# EAGLE board rev0.1 (EAGLE 8.3.1)
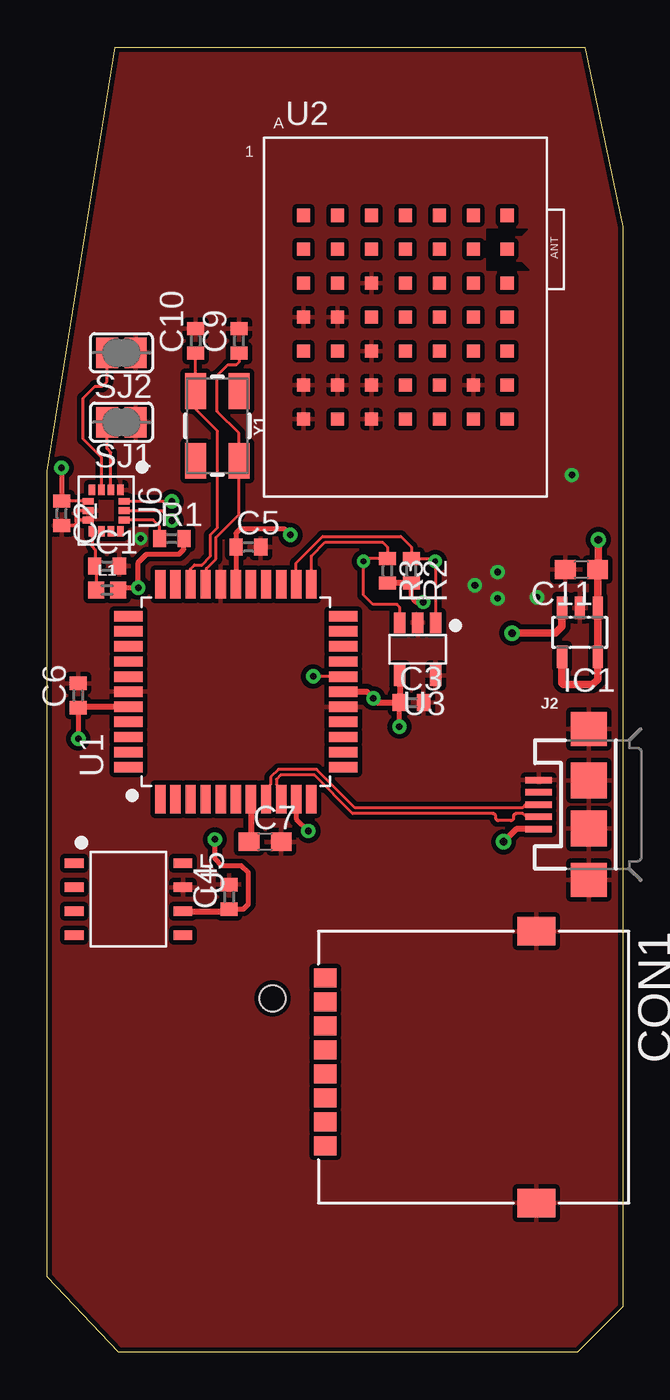
[diagram p0: board, top side]
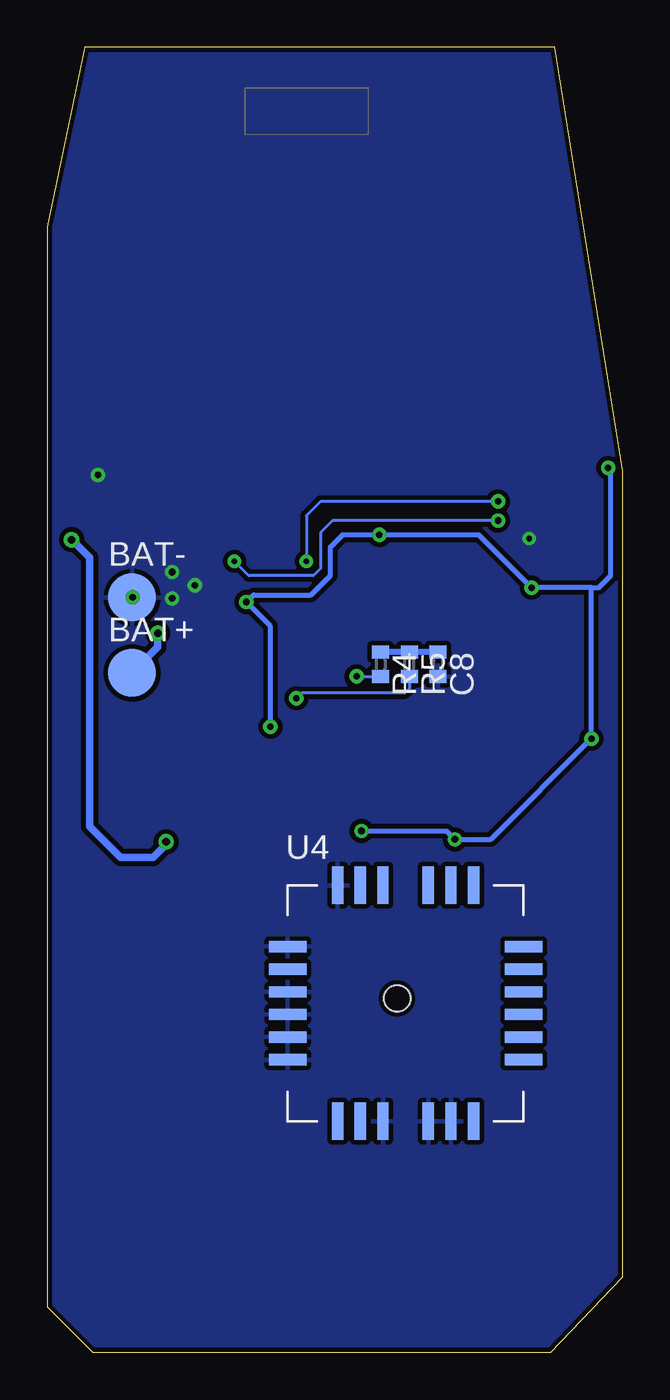
[diagram p1: board, bottom side, seen from below]

Size 30.5 x 69.15 mm. Coordinates in mm from the lower left corner, seen from the top.
Outline: 28.1,0 3.8,0 0,4 0,46.7 3.6,69.15 28.5,69.15 30.5,59.65 30.5,2.4 28.1,0
Copper layers (1*16): Top 0.035mm / dielectric 1.5mm / Bottom 0.035mm
Design rules "default *": minimum track width 6mil, minimum drill 0.3mm, track to track 6mil, track to pad 6mil, pad to pad 6mil, via to via 6mil, smd to smd 6mil, copper to edge 10mil, drill to drill 6mil, minimum pad ring 10mil, minimum via ring 8mil, stop-mask expansion 4mil, vias tented up to drill 0mil, thermal gap 10mil

## Footprints (pad centres in the part's own frame; a part is rotated, then mirrored left to right if it is on the bottom)
B2,54 = smd 2.54 x 2.54: TP 0,0
C0402 = smd 0.7 x 0.9: 1 -0.65,0; 2 0.65,0
C0603 = smd 1.1 x 1: 1 -0.85,0; 2 0.85,0
SIMCARD_HOLDER_693022010811 = smd 1 x 1.2: C1 -4.72,0; C2 -2.18,0; C3 0.36,0; C4 2.9,0; C5 -3.45,0; C6 -0.91,0; C7 1.63,0; C8 4.17,0 | smd 1.5 x 2: P$9 -7.2,11.2; P$10 7.2,11.2
SOT23-5L = smd 0.55 x 1.2: 1 -0.95,-1.3; 2 0,-1.3; 3 0.95,-1.3; 4 0.95,1.3; 5 -0.95,1.3
USB-MICROB = smd 1.4 x 0.35: D+ -2.65,0; D- -2.65,-0.65; GND -2.65,1.3; ID -2.65,0.65; VBUS -2.65,-1.3 | smd 1.9 x 1.8: MT1 0,-4; MT2 0,4 | smd 1.9 x 1.9: P$1 0,-1.27; P$2 0,1.27
0402 = smd 0.85 x 0.9: 1 -0.58,0; 2 0.58,0
R0402 = smd 0.7 x 0.9: 1 -0.65,0; 2 0.65,0
SJ = smd 1.168 x 1.6: 1 -0.762,0; 2 0.762,0
PIC24FJ128GB204 = smd 1.5 x 0.55: 1 -5.7,4; 2 -5.7,3.2; 3 -5.7,2.4; 4 -5.7,1.6; 5 -5.7,0.8; 6 -5.7,0; 7 -5.7,-0.8; 8 -5.7,-1.6; 9 -5.7,-2.4; 10 -5.7,-3.2; 11 -5.7,-4; 23 5.7,-4; 24 5.7,-3.2; 25 5.7,-2.4; 26 5.7,-1.6; 27 5.7,-0.8; 28 5.7,0; 29 5.7,0.8; 30 5.7,1.6; 31 5.7,2.4; 32 5.7,3.2; 33 5.7,4 | smd 0.55 x 1.5: 12 -4,-5.7; 13 -3.2,-5.7; 14 -2.4,-5.7; 15 -1.6,-5.7; 16 -0.8,-5.7; 17 0,-5.7; 18 0.8,-5.7; 19 1.6,-5.7; 20 2.4,-5.7; 21 3.2,-5.7; 22 4,-5.7; 34 4,5.7; 35 3.2,5.7; 36 2.4,5.7; 37 1.6,5.7; 38 0.8,5.7; 39 0,5.7; 40 -0.8,5.7; 41 -1.6,5.7; 42 -2.4,5.7; 43 -3.2,5.7; 44 -4,5.7
TELIT_RE866 = smd 0.7 x 0.7: A1 -5.4,5.4; A2 -3.6,5.4; A3 -1.8,5.4; A4 0,5.4; A5 1.8,5.4; A6 3.6,5.4; A7 5.4,5.4; B1 -5.4,3.6; B2 -3.6,3.6; B3 -1.8,3.6; B4 0,3.6; B5 1.8,3.6; B6 3.6,3.6; B7 5.4,3.6; C1 -5.4,1.8; C2 -3.6,1.8; C3 -1.8,1.8; C4 0,1.8; C5 1.8,1.8; C6 3.6,1.8; C7 5.4,1.8; D1 -5.4,0; D2 -3.6,0; D3 -1.8,0; D4 0,0; D5 1.8,0; D6 3.6,0; D7 5.4,0; E1 -5.4,-1.8; E2 -3.6,-1.8; E3 -1.8,-1.8; E4 0,-1.8; E5 1.8,-1.8; E6 3.6,-1.8; E7 5.4,-1.8; F1 -5.4,-3.6; F2 -3.6,-3.6; F3 -1.8,-3.6; F4 0,-3.6; F5 1.8,-3.6; F6 3.6,-3.6; F7 5.4,-3.6; G1 -5.4,-5.4; G2 -3.6,-5.4; G3 -1.8,-5.4; G4 0,-5.4; G5 1.8,-5.4; G6 3.6,-5.4; G7 5.4,-5.4
24LC32A-SOT23-5 = smd 0.6 x 1.1: 1 -0.95,-1.4; 2 0,-1.4; 3 0.95,-1.4; 4 0.95,1.4; 5 -0.95,1.4
TITAN-X1-GMS-3302 = smd 2 x 0.6: 1 -6.25,3; 2 -6.25,1.8; 3 -6.25,0.6; 4 -6.25,-0.6; 5 -6.25,-1.8; 6 -6.25,-3; 13 6.25,-3; 14 6.25,-1.8; 15 6.25,-0.6; 16 6.25,0.6; 17 6.25,1.8; 18 6.25,3 | smd 0.6 x 2: 7 -3.6,-6.25; 8 -2.4,-6.25; 9 -1.2,-6.25; 10 1.2,-6.25; 11 2.4,-6.25; 12 3.6,-6.25; 19 3.6,6.25; 20 2.4,6.25; 21 1.2,6.25; 22 -1.2,6.25; 23 -2.4,6.25; 24 -3.6,6.25 | hole 1.4: -0.45,0.25
AT45DB161E-SHD2B-T = smd 0.5 x 1: 1 -1.905,-2.875; 2 -0.635,-2.875; 3 0.635,-2.875; 4 1.905,-2.875; 5 1.905,2.875; 6 0.635,2.875; 7 -0.635,2.875; 8 -1.905,2.875
LSM6DSL = smd 0.575 x 0.35: 1 -1.1,0.75; 2 -1.1,0.25; 3 -1.1,-0.25; 4 -1.1,-0.75; 8 1.1,-0.75; 9 1.1,-0.25; 10 1.1,0.25; 11 1.1,0.75 | smd 0.35 x 0.575: 5 -0.5,-0.95; 6 0,-0.95; 7 0.5,-0.95; 12 0.5,0.95; 13 0,0.95; 14 -0.5,0.95
CRYSTAL-SMD-5X3.2-4PAD = smd 1.9 x 1.1: 1 -1.85,-1.15; 2 1.85,-1.15; 3 1.85,1.15; 4 -1.85,1.15

## Placement (x,y rotation side)
BAT+  PTR1B2,54  [B2,54]  26,36 0 bottom
BAT-  PTR1B2,54  [B2,54]  26,40 0 bottom
C1  0.1uF  [C0402]  3.17,41.66 0 top
C2  0.1uF  [C0402]  0.76,44.45 270 top
C3  0.1uF  [C0402]  19.3,34.42 0 top
C4  0.1uF  [C0402]  9.65,24.13 90 top
C5  0.1uF  [C0402]  10.67,42.67 0 top
C6  0.1uF  [C0402]  1.65,34.8 90 top
C7  10uF  [C0603]  11.56,27.05 0 top
C8  0.1uF  [C0402]  9.78,36.45 270 bottom
C9  22pF  [C0402]  10.16,53.59 90 top
C10  22pF  [C0402]  7.87,53.59 90 top
C11  1uF  [C0603]  28.32,41.47 180 top
CON1  SIMCARD_HOLDER_693022010811  [SIMCARD_HOLDER_693022010811]  14.73,15.11 270 top
IC1  MCP73811/2  [SOT23-5L]  28.23,38.15 180 top
J2  [USB-MICROB]  28.7,29.02 0 top
L1  MPZ1608D300BTA00  [0402]  3.17,40.39 0 top
R1  10K  [R0402]  6.6,43.12 0 top
R2  4.7K  [R0402]  19.3,41.4 270 top
R3  4.7K  [R0402]  18.03,41.4 270 top
R4  100R  [R0402]  12.83,36.45 270 bottom
R5  10K  [R0402]  11.3,36.45 270 bottom
SJ1  [SJ]  3.94,49.28 180 top
SJ2  [SJ]  3.94,52.96 180 top
U1  PIC24FJ128GB204  [PIC24FJ128GB204]  10,35 90 top
U2  TELIT_RE866  [TELIT_RE866]  18.98,54.84 0 top
U3  24LC32A-SOT23-5  [24LC32A-SOT23-5]  19.64,37.26 180 top
U4  TITAN-X1-GMS-3302  [TITAN-X1-GMS-3302]  11.5,18.5 0 bottom
U5  AT45DB161E-SHD2B-T  [AT45DB161E-SHD2B-T]  4.32,24 270 top
U6  LSM6DSL  [LSM6DSL]  3.13,44.6 270 top
Y1  16MHz  [CRYSTAL-SMD-5X3.2-4PAD]  9.02,49.09 270 top

## Library data of the parts
BAT+ BAT- = testpad
C1-C11 R1-R5 = resistor
CON1 U1-U6 = clackboard_lib
IC1 = adafruit
J2 = SparkFun-Connectors; PROD_ID: CONN-09505; SF_ID: PRT-08533
L1 = SparkFun-Coils; PROD_ID: NDUC-13457
SJ1 SJ2 = jumper
Y1 = SparkFun-Clocks; PROD_ID: XTAL-08218; SF_ID: COM-00094

## Nets
3.3V: C2.1 C3.1 C4.1 C5.1 C6.1 L1.2 R1.2 R2.2 R3.2 R5.2 U1.10 U1.17 U1.28 U1.40 U3.4 U5.6 U6.5
CS: U5.4
GND: BAT-.TP C1.2 C2.2 C3.2 C4.2 C5.2 C6.2 C7.2 C8.2 C9.2 C10.2 C11.2 CON1.P$9 CON1.P$10 IC1.2 J2.GND J2.MT1 J2.MT2 J2.P$1 J2.P$2 SJ1.1 SJ2.1 U1.16 U1.29 U1.39 U2.C3 U2.D1 U2.D2 U2.E3 U2.F1 U2.F2 U2.F3 U2.F6 U2.G1 U2.G3 U3.2 U3.5 U4.1 U4.3 U4.4 U4.5 U4.6 U4.9 U4.10 U4.11 U4.24 U5.7 U6.1 U6.6 U6.7
INT1: U6.4
INT2: U6.9
MCLR: R4.2 U1.18
MISO: U5.8
MOSI: U5.1
N$1: SJ1.2 U6.2
N$2: SJ2.2 U6.3
N$3: R1.1 U6.12
N$5: C1.1 L1.1 U6.8
N$6: C8.1 R4.1 R5.1
N$7: C9.1 U1.30 Y1.3
N$8: C10.1 U1.31 Y1.1
N$9: C7.1 U1.7
RESET: U5.3
RX0: U4.20
SCK: U5.2
SCL: R2.1 U1.24 U3.1 U6.13
SDA: R3.1 U1.23 U3.3 U6.14
TX0: U4.19
USB_N: J2.D- U1.9
USB_P: J2.D+ U1.8
V_USB: C11.1 IC1.1 IC1.4 IC1.5 J2.VBUS
VBAT: BAT+.TP IC1.3
WP: U5.5

## Tracks (layer width: path | path; a pad name or v marks a point on that pad's centre or on a via)
3.3V  (via drill 0.35)
  Top 0.152: U6.5 C2.1
  Top 0.254: C4.1 10.4,23.48 10.67,23.75 10.67,25.4 10.29,25.78 9.27,25.78 8.89,26.16 v8.89,27.18 | C6.1 v1.65,32.51 | C3.1 18.65,33.16 v18.67,33.15 | v19.94,39.75 19.56,39.75 19.3,40.01 R2.2 | L1.2 3.88,40.51 v4.83,40.51 4.83,41.85 5.27,42.29 6.99,42.29 7.24,42.55 7.24,43.1 R1.2 | v0.76,46.86 C2.1 | 10,42.65 U1.28 | 10,42.65 C5.1 | U1.10 13.2,28.27 v13.84,27.62 | v12.89,43.31 12.57,43.62 10.22,43.62 10,43.4 10,42.65
  Top 0.305: R2.2 R3.2 | U5.6 9.54,23.36 C4.1 | U1.17 16.94,35 v17.29,34.65 17.53,34.42 C3.1 18.69,34.45 U3.4 | U1.40 1.7,34.2 C6.1
  Bottom 0.152: R5.2 11.3,35.18 11.56,34.92 17.02,34.92 v17.29,34.65
  Bottom 0.254: v18.67,33.15 18.67,38.48 v19.94,39.75 19.56,40.13 16.51,40.13 15.49,41.15 15.49,42.67 14.86,43.31 v12.89,43.31 7.62,43.31 v4.83,40.51 1.63,40.51 | 1.63,40.51 1.27,40.51 0.64,41.15 0.64,46.74 v0.76,46.86 | 1.63,40.51 1.65,40.49 v1.65,32.51 6.99,27.18 v8.89,27.18 9.34,27.62 v13.84,27.62
GND  (via drill 0.3, 0.35)
  Top 0.152: SJ2.1 3.3,52.96 | SJ1.1 3.05,49.28 | U6.7 1.68,44.1 1.55,43.97 | 1.55,43.97 1.4,43.81 0.78,43.81 C2.2 | U6.6 1.54,44.6 1.52,44.58 1.52,44 1.55,43.97
  other vias: 27.81,46.48 4.95,43.12 23.88,39.94 25.97,40.01 23.88,41.34 22.67,40.64
  pour Bottom (isolate 0.254): 0,0 0,70.1 31.88,70.1 31.88,0
  pour Top (isolate 0.254): 31.88,0 31.88,70.1 0,70.1 0,0
MCLR  (via drill 0.35)
  Top 0.152: U1.18 14.24,35.8 v14.1,35.81
  Bottom 0.152: v14.1,35.81 12.84,35.81 R4.2
N$1
  Top 0.152: U6.2 3.38,47.68 3.17,47.88 SJ1.2
N$2
  Top 0.152: U6.3 2.88,47.41 1.91,48.39 1.91,50.55 2.54,51.18 2.92,51.18 3.17,51.44 SJ2.2
N$3
  Top 0.152: R1.1 5.95,43.77 5.62,44.1 U6.12
N$4
  cutout Top: 25.53,57.34 23.3,57.34 23.3,59.5 25.46,59.5 25.15,59.18 24.19,59.18 23.88,58.86 23.88,58.04 24.19,57.72 25.15,57.72
N$5
  Top 0.152: U6.8 2.38,42.71 2.54,42.55 2.54,41.67 C1.1 2.6,41.59 L1.1
N$6
  Bottom 0.305: C8.1 R5.1 R4.1
N$7
  Top 0.152: U1.30 8.45,40.74 8.45,41.53 8.95,42.04 8.95,43.18 10.17,44.39 Y1.3 10.17,48.7 9.02,49.85 9.02,51.75 9.59,52.32 10.03,52.32 10.16,52.45 C9.1
N$8
  Top 0.152: U1.31 7.6,41.51 7.81,41.72 8.21,41.72 8.65,42.16 8.65,43.31 9.02,43.67 9.02,48.83 7.87,49.98 Y1.1 C10.1
N$9
  Top 0.305: U1.7 10.8,27.14 C7.1
SCL  (via drill 0.3, 0.35)
  Top 0.152: U1.24 13.2,41.83 14.61,43.23 18.75,43.23 19.3,42.67 R2.1 20.43,42.05 v20.57,41.91 20.57,38.67 U3.1 | U6.13 6.08,44.6 v6.6,44.07
  Bottom 0.152: v6.6,44.07 15.37,44.07 16,43.43 16,41.53 16.38,41.15 19.81,41.15 v20.57,41.91
SDA  (via drill 0.3, 0.35)
  Top 0.152: U1.23 14,42.19 14.73,42.93 17.78,42.93 18.03,42.67 R3.1 16.91,42.05 v16.76,41.91 16.76,40.13 17.27,39.62 18.54,39.62 18.69,39.47 U3.3 | U6.14 v6.59,45.1 v6.6,45.09
  Bottom 0.152: v6.6,45.09 16,45.09 16.76,44.32 v16.76,41.91
USB_N
  Top 0.152: U1.9 12.4,29.85 12.15,30.1 12.15,30.35 12.38,30.58 14.16,30.58 16.19,28.55 23.62,28.55 arc-90 23.77,28.4 23.77,28.32 arc90 23.93,28.17 24.57,28.17 arc90 24.72,28.32 24.72,28.4 arc-90 24.88,28.55 25.21,28.55 25.39,28.37 J2.D-
USB_P
  Top 0.152: U1.8 11.6,29.85 11.85,30.1 11.85,30.48 12.26,30.89 14.29,30.89 16.32,28.85 25.21,28.85 25.38,29.02 J2.D+
V_USB  (via drill 0.41)
  Top 0.33: J2.VBUS 24.86,27.72 v24.19,27.05
  Top 0.406: IC1.4 27.28,35.45 27.37,35.37 28.89,35.37 29.18,35.66 IC1.5 IC1.1 29.18,41.45 | 29.18,41.45 C11.1 | v29.21,43.05 29.21,41.48 29.18,41.45
  Bottom 0.406: v24.19,27.05 24.26,26.99 24.26,26.86 24.89,26.23 26.61,26.23 28.25,27.87 28.25,42.1 v29.21,43.05
VBAT  (via drill 0.41)
  Top 0.406: IC1.3 27.28,38.46 26.92,38.1 v24.64,38.1
  Bottom 0.406: v24.64,38.1 24.64,37.36 BAT+.TP

## Text on the board
Reference: usb | button | SIM CARD
tDocu: ANT
bDocu: GPS